# Altium PCB BACK_UP_05_10_Analizador_de_espectro.PcbDoc (part 2 of 2)
Units mil, origin at the board's own origin, x right, y up, seen from the top; angles counter-clockwise.
Board outline 6000 x 4000 mil, 2 copper layers (Top Layer, Bottom Layer); 140 components, 98 nets, 612 pads, 248 vias.
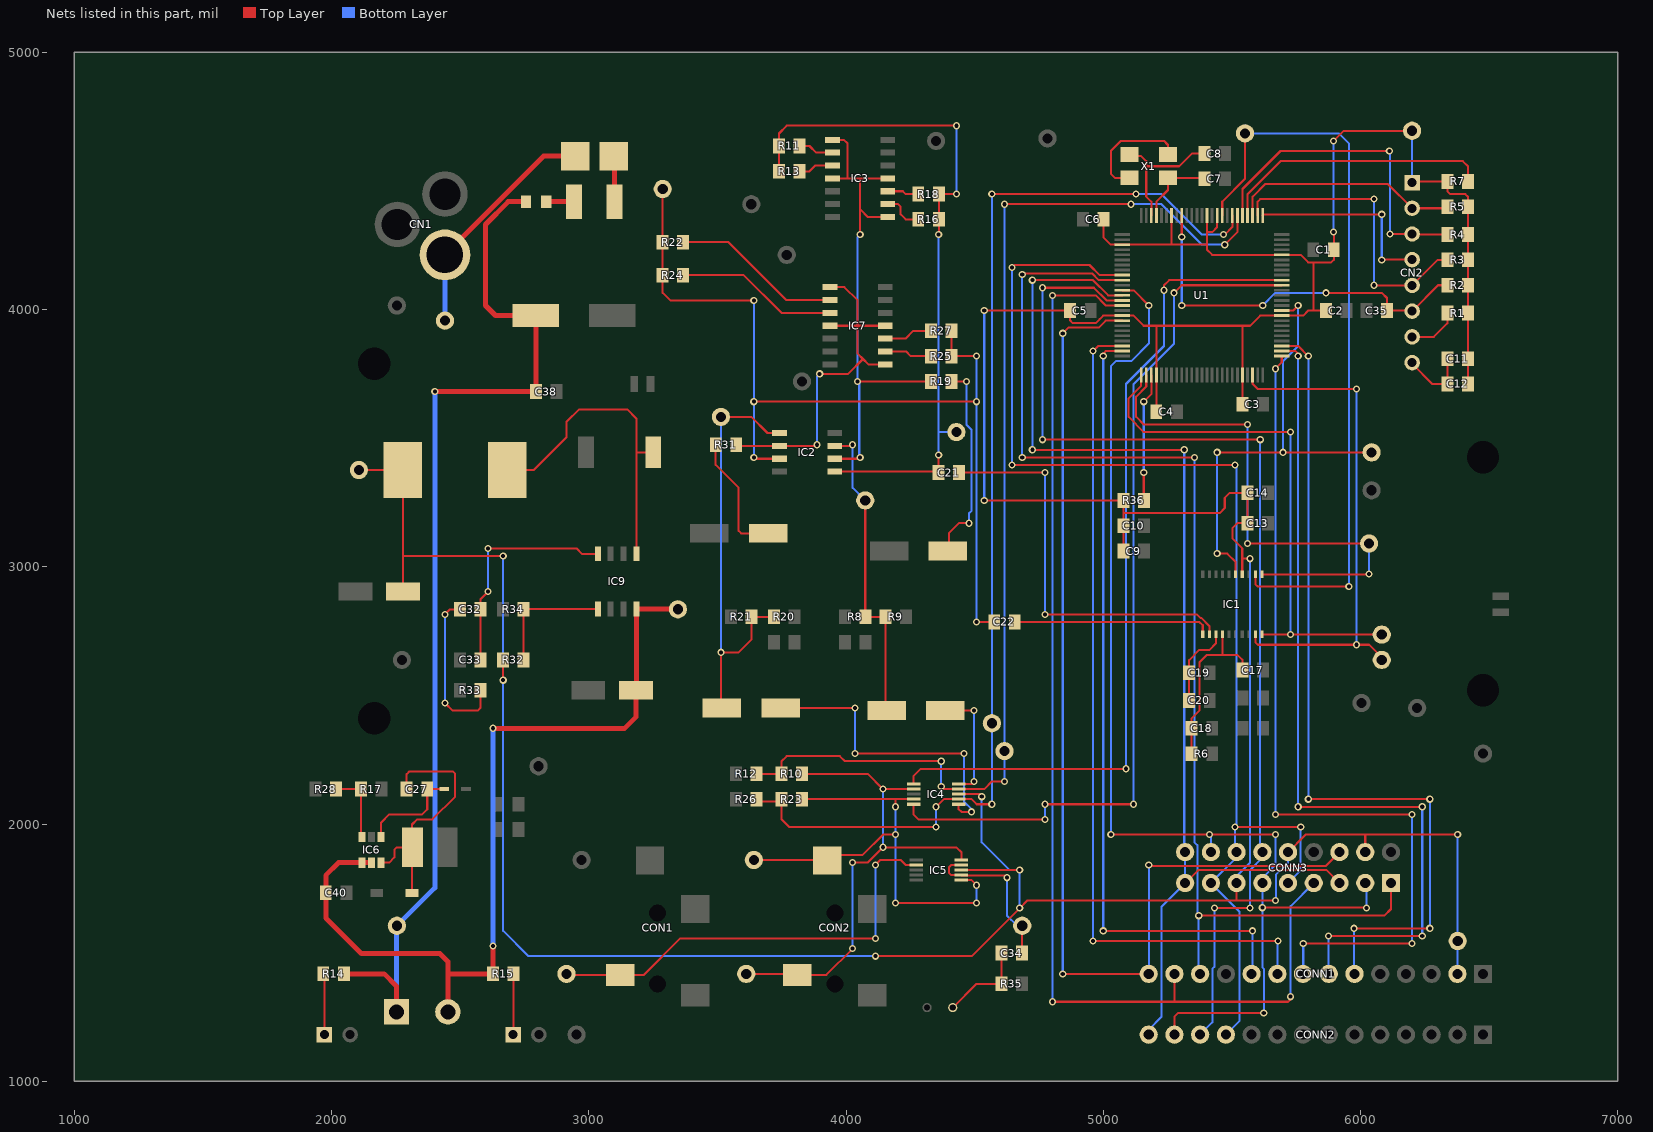
[diagram p2: the nets of this part, all layers, seen from the top]

## Via types
v1: diameter 28, hole 16, Top Layer to Bottom Layer, 248 vias

## Nets (pads, with @x,y where several pads share a name; then routed paths per layer and width w, separated by ;. In a path a pad name is that pad's centre, name@x,y a point inside that pad or via, vN(x,y) a via of type N, cw(c..) or ccw(c..) an arc to the next point about the centre after c; other vN are vias at no path point) (continued)
LCD_CS: CONN1.7 U1.77 | length 3326.3
  Top Layer w8: U1.77@5693.9,3838.58 5748.03,3838.58 5757.87,3828.74 v1(5757.87,3818.9) ; v1(5757.87,2066.93) v1(6240.16,2066.93) ; v1(5875.98,1564.96) v1(6240.16,1564.96)
  Bottom Layer w8: v1(5757.87,2066.93) v1(5757.87,3818.9) ; v1(5875.98,1564.96) 5875.98,1418.11 CONN1.7@5876.77,1417.32 ; v1(6240.16,1564.96) v1(6240.16,2066.93)
LCD_RD: CONN1.10 U1.49 | length 3071.7
  Top Layer w8: v1(5000,1584.65) v1(5580.71,1584.65) ; v1(5000,3818.9) 5000,3828.74 5009.84,3838.58 U1.49@5073.82,3838.58
  Bottom Layer w8: v1(5000,1584.65) v1(5000,3818.9) ; CONN1.10@5576.77,1417.32 5580.71,1421.26 v1(5580.71,1584.65)
LCD_RS: CONN1.8 U1.76 | length 3366.8
  Top Layer w8: v1(5669.29,2037.4) v1(6200.79,2037.4) ; v1(5669.29,3769.68) 5693.9,3794.29 U1.76@5693.9,3818.9 ; v1(5777.56,1535.43) v1(6200.79,1535.43)
  Bottom Layer w8: v1(5669.29,2037.4) v1(5669.29,3769.68) ; CONN1.8@5776.77,1417.32 5777.56,1418.11 v1(5777.56,1535.43) ; v1(6200.79,1535.43) v1(6200.79,2037.4)
LCD_RST: CONN1.6 U1.78 | length 3289.9
  Top Layer w8: U1.78@5693.9,3858.27 5757.87,3858.27 v1(5797.24,3818.9) ; v1(5797.24,2096.46) v1(6269.69,2096.46) ; v1(5974.41,1594.49) v1(6269.69,1594.49)
  Bottom Layer w8: v1(5797.24,2096.46) v1(5797.24,3818.9) ; v1(5974.41,1594.49) 5974.41,1419.69 CONN1.6@5976.77,1417.32 ; v1(6269.69,1594.49) v1(6269.69,2096.46)
LCD_WR: CONN1.9 U1.48 | length 3262.1
  Top Layer w8: v1(4960.63,1545.28) v1(5679.13,1545.28) ; v1(4960.63,3838.58) 4980.31,3858.27 U1.48@5073.82,3858.27
  Bottom Layer w8: v1(4960.63,1545.28) v1(4960.63,3838.58) ; CONN1.9@5676.77,1417.32 5676.77,1542.91 v1(5679.13,1545.28)
MIC-CH: C34.2 IC5.7 IC5.9 TP24.1 | length 635.5
  Top Layer w8: IC5.9@4447.83,1840.55 4409.45,1840.55 4399.61,1830.71 4399.61,1811.02 4409.45,1801.18 IC5.7@4447.83,1801.18 4449.61,1799.4 4617.92,1799.4 v1(4625.98,1791.34) ; C34.2@4684.84,1498.43 4684.84,1604.13 TP24.1@4685.04,1604.33
  Bottom Layer w8: v1(4625.98,1791.34) 4625.98,1643.7 4665.35,1604.33 TP24.1@4685.04,1604.33
MISO: CONN2.13 CONN3.2 CONN3.6 CONN3.17 U1.37 | length 4635.2
  Top Layer w8: v1(5029.53,1958.66) v1(5413.39,1958.66) v1(5669.29,1958.66) ; U1.37@5073.82,4074.8 5118.11,4074.8 v1(5177.17,4015.75) ; CONN2.13@5276.77,1181.1 5276.77,1251.18 5291.28,1265.68 v1(5624.08,1265.68) ; v1(5618.5,1674.8) 6022.05,1674.8 v1(6023.62,1673.23)
  Bottom Layer w8: v1(5029.53,1958.66) 5029.53,3779.53 5049.34,3799.34 5108.39,3799.34 5177.17,3868.11 v1(5177.17,4015.75) ; CONN2.13@5275.59,1182.28 CONN2.13@5276.77,1181.1 ; CONN3.17@5418.5,1890.71 v1@5418.5,1958.66 ; v1(5624.08,1265.68) 5624.2,1265.81 5624.2,1436.97 5618.5,1442.67 v1(5618.5,1674.8) CONN3.6@5618.5,1770.71 5618.5,1789.76 5669.29,1840.55 v1(5669.29,1958.66) ; CONN3.2@6018.5,1770.71 6023.62,1765.59 v1(6023.62,1673.23)
MOSI: CONN2.14 CONN3.3 CONN3.9 CONN3.18 U1.38 | length 4599.2
  Top Layer w8: v1(4724.41,3454.72) v1(5314.96,3454.72) ; v1(4724.41,4114.17) 4960.27,4114.17 5019.33,4055.12 U1.38@5073.82,4055.12 ; CONN3.9@5318.5,1770.71 5368.66,1820.87 5868.35,1820.87 CONN3.3@5918.5,1770.71
  Bottom Layer w8: v1(4724.41,3454.72) v1(4724.41,4114.17) ; CONN2.14@5176.77,1181.1 5176.77,1200.39 5226.38,1250 5226.38,1678.58 CONN3.9@5318.5,1770.71 CONN3.18@5318.5,1890.71 5314.96,1894.25 v1(5314.96,3454.72)
Netc7_2: C7.2 U1.22 X1.1 | length 302.6
  Top Layer w8: U1.22@5206.69,4365.16 5206.69,4419.29 5251.97,4464.57 X1.1@5251.97,4511.81 C7.2@5389.13,4511.81
Netc8_2: C8.2 U1.23 X1.3 | length 541.5
  Top Layer w8: X1.3@5102.36,4602.36 5108.27,4596.46 5147.64,4596.46 5167.32,4576.77 5167.32,4557.09 ; U1.23@5187.01,4365.16 5187.01,4419.29 5167.32,4438.98 5167.32,4557.09 ; C8.2@5393.07,4606.3 5344.49,4606.3 5295.28,4557.09 5167.32,4557.09
Netc11_2: C11.2 C12.2 CN2.8 | length 272.5
  Top Layer w8: CN2.8@6200.79,3793.7 6200.79,3789.37 6279.53,3710.63 C12.2@6337.95,3710.63 C11.2@6337.95,3809.06
NetC17_1: C17.1 C18.2 IC1.4 R6.2 | length 673.4
  Top Layer w8: R6.2@5343.86,2273.62 C18.2@5343.86,2372.05 5343.86,2410.79 5374.02,2440.94 5374.02,2627.95 5403.54,2657.48 5521.65,2657.48 5540.71,2638.43 C17.1@5540.71,2598.43 ; 5463.58,2658.46 IC1.4@5463.58,2738.19
NetC19_1: C19.1 C20.2 IC1.3 | length 324
  Top Layer w8: C20.2@5334.02,2480.32 C19.1@5334.02,2588.58 5334.02,2637.17 5374.02,2677.17 5413.39,2677.17 5437.99,2701.77 IC1.3@5437.99,2738.19
NetC21_1: C21.1 IC1.2 | length 1574.2
  Top Layer w8: C21.1@4439.61,3366.14 v1(4773.62,3366.14) ; v1(4773.62,2814.96) 5364.17,2814.96 5377.7,2801.43 5380.64,2801.43 5412.4,2769.67 IC1.2@5412.4,2738.19
  Bottom Layer w8: v1(4773.62,2814.96) v1(4773.62,3366.14)
NetC22_1: C22.1 IC1.1 | length 770.4
  Top Layer w8: C22.1@4656.14,2785.43 5374.02,2785.43 5386.81,2772.64 IC1.1@5386.81,2738.19
NetC24_1: C24.1 IC2.3 R8.1 R9.2 TP13.1 | length 1208.1
  Top Layer w8: IC2.3@3955.71,3469.88 4021.06,3469.88 v1(4025.59,3474.41) ; TP13.1@4074.8,3257.87 4074.8,2806.38 R8.1@4076.06,2805.12 R9.2@4153.54,2805.12 4153.54,2444.88 C24.1@4157.48,2440.94
  Bottom Layer w8: v1(4025.59,3474.41) 4025.59,3307.09 4069.88,3262.8 TP13.1@4069.88,3252.95
NetC24_2: C24.2 IC4.10 | length 451.9
  Top Layer w8: C24.2@4385.83,2440.94 v1(4498.03,2440.94) ; IC4.10@4437.99,2155.51 4488.19,2155.51 v1(4498.03,2165.35)
  Bottom Layer w8: v1(4498.03,2165.35) v1(4498.03,2440.94)
NetC25_1: C25.1 R19.2 | length 787.4
  Top Layer w8: C25.1@4395.67,3061.02 4399.61,3064.96 4399.61,3129.92 4438.98,3169.29 v1(4478.35,3169.29) ; R19.2@4410.08,3720.47 v1(4468.5,3720.47)
  Bottom Layer w8: v1(4468.5,3720.47) 4468.5,3551.33 4488.19,3531.65 4488.19,3218.5 4478.35,3208.66 v1(4478.35,3169.29)
NetC27_1: C27.1 D5.2 IC6.1 | length 401.3
  Top Layer w8: IC6.1@2193.01,1949.61 2193.01,2006 2224.41,2037.4 2352.36,2037.4 2372.05,2057.09 C27.1@2372.05,2135.83 D5.2@2437.99,2135.83
NetC27_2: C27.2 D6.2 IC6.6 L2.1 | length 983.3
  Top Layer w8: IC6.6@2193.01,1849.61 2223.62,1849.61 2244.09,1870.08 2244.09,1899.61 2253.94,1909.45 L2.1@2312.99,1909.45 ; C27.2@2292.05,2135.83 2292.05,2193.62 2303.15,2204.72 2470.47,2204.72 2480.32,2194.88 2480.32,2106.3 2391.73,2017.72 2332.68,2017.72 2312.99,1998.03 L2.1@2312.99,1909.45 ; D6.2@2312.99,1732.28 L2.1@2312.99,1909.45
NetC32_1: C32.1 C33.1 IC9.4 | length 880.6
  Top Layer w8: C33.1@2579.37,2637.8 C32.1@2579.37,2834.65 2579.37,2874.65 v1(2608.27,2903.54) ; v1(2608.27,3070.87) 2952.76,3070.87 2973.43,3050.2 IC9.4@3035.24,3050.2
  Bottom Layer w8: v1(2608.27,2903.54) v1(2608.27,3070.87)
NetC32_2: C32.2 R33.2 | length 634.3
  Top Layer w8: v1(2440.94,2470.47) 2470.47,2440.94 2568.9,2440.94 2578.74,2450.79 2578.74,2519.06 R33.2@2579.37,2519.68 ; v1(2440.94,2814.96) 2460.63,2834.65 C32.2@2499.37,2834.65
  Bottom Layer w8: v1(2440.94,2470.47) v1(2440.94,2814.96)
NetC34_1: C34.1 MIC1.1 R35.1 | length 348
  Top Layer w8: MIC1.1@4415,1286.26 4506.69,1377.95 4604.37,1377.95 R35.1@4604.84,1378.43 C34.1@4604.84,1498.43
Netc35_1: C35.1 CN2.6 R2.1 U1.17 | length 1502.4
  Top Layer w8: v1(5305.12,4015.75) v1(5620.08,4015.75) ; v1(5305.12,4281.5) U1.17@5305.12,4365.16 ; v1(5866.14,4064.96) 5984.25,4064.96 6082.68,4064.96 6102.99,4044.65 C35.1@6102.99,3996.06 6198.43,3996.06 CN2.6@6200.79,3993.7 6301.57,4094.49 R2.1@6337.95,4094.49
  Bottom Layer w8: v1(5305.12,4015.75) v1(5305.12,4281.5) ; v1(5620.08,4015.75) 5669.29,4064.96 v1(5866.14,4064.96)
NetC36_1: C36.1 IC2.5 R20.1 R21.2 TP16.1 | length 1701.8
  Top Layer w8: TP16.1@3513.78,3582.68 3631.89,3582.68 3694.68,3519.88 IC2.5@3741.14,3519.88 ; C36.1@3517.72,2450.79 3513.78,2454.72 v1(3513.78,2667.32) 3582.68,2667.32 3633.15,2717.8 R21.2@3633.15,2805.12 R20.1@3720.47,2805.12
  Bottom Layer w8: v1(3513.78,2667.32) TP16.1@3513.78,3582.68
NetC36_2: C36.2 IC4.6 | length 1192.5
  Top Layer w8: C36.2@3755.91,2450.79 v1(4035.43,2450.79) ; v1(4035.43,2273.62) v1(4458.66,2273.62) ; IC4.6@4437.99,2076.77 4437.99,2057.09 4438.98,2057.09 4448.82,2047.24 v1(4488.19,2047.24)
  Bottom Layer w8: v1(4035.43,2273.62) v1(4035.43,2450.79) ; v1(4458.66,2273.62) 4458.66,2086.61 4488.19,2057.09 v1(4488.19,2047.24)
NetC37_1: C37.1 R31.2 | length 489.8
  Top Layer w8: R31.2@3493.46,3474.41 3493.46,3396.3 3582.68,3307.09 3582.68,3139.76 3592.52,3129.92 C37.1@3696.85,3129.92
NetCN1_1: CN1.1 D1.1 TP18.1 | length 920.8
  Top Layer w19.68: CN1.1@2440.95,4212.6 2824.8,4596.46 D1.1@2946.85,4596.46
  Bottom Layer w19.68: TP18.1@2440.94,3956.69 CN1.1@2440.95,4212.6
NetCN2_2: CN2.2 R5.1 U1.3 | length 893
  Top Layer w8: U1.3@5580.71,4365.16 5580.71,4438.98 5629.92,4488.19 6106.3,4488.19 CN2.2@6200.79,4393.7 6332.05,4393.7 R5.1@6337.95,4399.61
NetCN2_3: CN2.3 R4.1 U1.5 | length 1283.1
  Top Layer w8: U1.5@5541.34,4365.16 5541.34,4468.5 5688.98,4616.14 v1(6112.2,4616.14) ; v1(6114.57,4293.7) CN2.3@6200.79,4293.7 6203.15,4291.34 R4.1@6337.95,4291.34
  Bottom Layer w8: v1(6112.2,4616.14) 6114.57,4613.78 v1(6114.57,4293.7)
NetCN2_4: CN2.4 U1.1 | length 760.2
  Top Layer w8: U1.1@5620.08,4365.16 5625,4370.08 v1(6082.68,4370.08) ; v1(6082.68,4192.91) 6083.46,4193.7 CN2.4@6200.79,4193.7
  Bottom Layer w8: v1(6082.68,4192.91) v1(6082.68,4370.08)
NetCN2_5: CN2.5 R3.1 U1.2 | length 1170.7
  Top Layer w8: U1.2@5600.39,4365.16 5600.39,4419.29 5610.24,4429.13 v1(6053.15,4429.13) ; v1(6053.15,4094.49) 6053.94,4093.7 CN2.5@6200.79,4093.7 6299.21,4192.13 R3.1@6337.17,4192.13
  Bottom Layer w8: v1(6053.15,4094.49) v1(6053.15,4429.13)
NetCN2_7: CN2.7 R1.1 | length 198.9
  Top Layer w8: CN2.7@6200.79,3893.7 6285.43,3893.7 6337.95,3946.22 R1.1@6337.95,3986.22
NetD1_2: D1.2 PS1.1 | length 181.1
  Top Layer w19.68: PS1.1@3100.39,4419.29 D1.2@3100.39,4600.39
NetD2_2: D2.2 IC9.1 L1.1 | length 1241.5
  Top Layer w8: L1.1@2683.07,3375.98 2785.43,3375.98 2913.39,3503.94 2913.39,3562.99 2962.6,3612.2 3149.61,3612.2 3185.24,3576.57 3185.24,3444.88 ; IC9.1@3185.24,3050.2 3185.24,3444.88 ; D2.2@3250.98,3444.88 3185.24,3444.88
NetD3_1: D3.1 R14.2 | length 238.1
  Top Layer w8: R14.2@1967.87,1417.32 1972.44,1412.76 D3.1@1972.44,1181.1
NetD4_1: D4.1 R15.1 | length 236.8
  Top Layer w8: D4.1@2705.91,1181.1 2707.32,1182.52 R15.1@2707.32,1417.32
NetFB1_1: FB1.1 PS1.2 | length 108.3
  Top Layer w19.68: FB1.1@2834.65,4419.29 PS1.2@2942.91,4419.29
NetIC1_9: IC1.9 TP9.1 U1.73 | length 1997.2
  Top Layer w8: U1.73@5580.71,3745.08 5580.71,3710.63 5600.39,3690.94 v1(5984.25,3690.94) ; IC1.9@5591.54,2738.19 5591.54,2706.69 5601.38,2696.85 v1(5984.25,2696.85) 6033.46,2696.85 6082.68,2647.64 TP9.1@6092.52,2647.64
  Bottom Layer w8: v1(5984.25,2696.85) v1(5984.25,3690.94)
NetIC1_10: IC1.10 TP8.1 U1.51 | length 2090.1
  Top Layer w8: U1.51@5147.64,3745.08 5147.64,3703.73 5098.43,3654.52 5098.43,3582.68 5157.48,3523.62 v1(5728.35,3523.62) ; IC1.10@5617.13,2736.22 v1(5728.35,2736.22) TP8.1@6082.68,2736.22
  Bottom Layer w8: v1(5728.35,2736.22) v1(5728.35,3523.62)
NetIC1_11: IC1.11 TP7.1 U1.52 | length 2093.7
  Top Layer w8: U1.52@5167.32,3745.08 5167.32,3700.79 5127.95,3661.42 5127.95,3582.68 5157.48,3553.15 v1(5561.02,3553.15) ; v1(5561.02,3090.55) TP7.1@6033.46,3090.55 ; IC1.11@5617.13,2970.47 6021.65,2970.47 v1(6033.46,2972.44)
  Bottom Layer w8: v1(5561.02,3090.55) v1(5561.02,3553.15) ; v1(6033.46,2972.44) TP7.1@6033.46,3090.55
NetIC1_12: IC1.12 TP6.1 U1.9 | length 2922.1
  Top Layer w8: U1.9@5462.6,4365.16 5462.6,4419.29 5551.18,4507.87 TP6.1@5551.18,4685.04 ; IC1.12@5591.54,2970.47 5591.54,2932.09 5600.39,2923.23 v1(5954.72,2923.23)
  Bottom Layer w8: TP6.1@5551.18,4694.88 5561.02,4685.04 5915.35,4685.04 5954.72,4645.67 v1(5954.72,2923.23) ; TP6.1@5551.18,4714.57 TP6.1@5561.02,4704.72
NetIC1_15: IC1.15 TP5.1 U1.85 | length 1795.1
  Top Layer w8: v1(5442.91,3051.18) 5482.28,3051.18 5514.76,3018.7 IC1.15@5514.76,2970.47 ; v1(5442.91,3444.88) v1(5698.81,3444.88) TP5.1@6043.31,3444.88 ; U1.85@5693.9,3996.06 5738.19,3996.06 v1(5757.87,4015.75)
  Bottom Layer w8: v1(5442.91,3051.18) v1(5442.91,3444.88) ; v1(5698.81,3444.88) 5698.82,3799.21 5757.87,3858.27 v1(5757.87,4015.75)
NetIC3_2: IC3.2 R11.2 | length 138.5
  Top Layer w8: R11.2@3819.53,4635.83 3858.27,4635.83 3884.29,4609.8 IC3.2@3947.24,4609.8
NetIC3_3: IC3.3 R13.2 | length 137
  Top Layer w8: R13.2@3819.53,4537.4 3858.27,4537.4 3880.67,4559.8 IC3.3@3947.24,4559.8
NetIC3_9: IC3.9 R16.2 | length 165
  Top Layer w8: IC3.9@4161.81,4409.8 4202.4,4409.8 4212.6,4399.61 4212.6,4370.08 4232.28,4350.39 4271.02,4350.39 R16.2@4280.87,4340.55
NetIC3_10: IC3.10 R18.2 | length 123.6
  Top Layer w8: IC3.10@4161.81,4459.8 4221.3,4459.8 4232.28,4448.82 R18.2@4280.87,4448.82
NetIC4_1: IC4.1 U1.91 | length 3275.8
  Top Layer w8: IC4.1@4262.8,2155.51 4261.81,2156.5 4261.81,2185.04 4291.34,2214.57 v1(5088.58,2214.57) ; v1(5236.22,4074.8) 5236.22,4094.49 5255.9,4114.17 U1.91@5693.9,4114.17
  Bottom Layer w8: v1(5088.58,2214.57) 5088.58,3710.63 5236.22,3858.27 v1(5236.22,4074.8)
NetIC4_5: IC4.5 U1.90 | length 3447.2
  Top Layer w8: IC4.5@4262.8,2076.77 4261.81,2075.79 4261.81,2037.4 4281.5,2017.72 v1(4773.62,2017.72) ; v1(4773.62,2076.77) v1(5118.11,2076.77) ; v1(5275.59,4064.96) 5305.12,4094.49 U1.90@5693.9,4094.49
  Bottom Layer w8: v1(4773.62,2017.72) v1(4773.62,2076.77) ; v1(5118.11,2076.77) 5118.11,3710.63 5275.59,3868.11 v1(5275.59,4064.96)
NetIC4_7: IC4.7 R23.2 R26.1 TP14.1 U1.7 | length 4518.5
  Top Layer w8: R26.1@3652.2,2086.61 3749.37,2086.61 3749.37,2018.35 3779.53,1988.19 v1(4350.39,1988.19) ; v1(4350.39,2066.93) 4379.92,2096.46 IC4.7@4437.99,2096.46 4488.19,2096.46 4507.87,2076.77 v1(4566.93,2076.77) ; v1(4566.93,4448.82) v1(5127.95,4448.82) ; v1@5472.44,4291.34 5501.97,4320.87 U1.7@5501.97,4365.16
  Bottom Layer w8: v1(4350.39,1988.19) v1(4350.39,2066.93) ; v1(4566.93,2076.77) TP14.1@4566.93,2391.73 v1(4566.93,4448.82) ; v1(5127.95,4448.82) 5226.38,4448.82 5383.86,4291.34 v1(5467.52,4291.34)
NetIC4_9: IC4.9 R10.2 R12.1 TP11.1 U1.6 | length 4443
  Top Layer w8: R12.1@3652.2,2194.88 R10.2@3749.37,2194.88 3749.37,2243.46 3769.68,2263.78 3976.38,2263.78 3996.06,2244.09 v1(4370.08,2244.09) ; v1(4370.08,2145.67) 4379.92,2135.83 IC4.9@4437.99,2135.83 4537.4,2135.83 4566.93,2165.35 v1(4616.14,2165.35) ; v1(4616.14,4409.45) v1(5108.27,4409.45) ; v1(5472.44,4251.97) 5521.65,4301.18 U1.6@5521.65,4365.16
  Bottom Layer w8: v1(4370.08,2145.67) v1(4370.08,2244.09) ; v1(4616.14,2165.35) TP11.1@4616.14,2283.46 v1(4616.14,4409.45) ; v1(5108.27,4409.45) 5226.38,4409.45 5383.86,4251.97 v1(5472.44,4251.97)
NetIC6_3: IC6.3 R17.1 R28.2 | length 284.7
  Top Layer w8: R28.2@2017.72,2135.83 R17.1@2114.88,2135.83 2114.88,1952.74 IC6.3@2118.01,1949.61
NetIC7_2: IC7.2 R22.2 | length 664.3
  Top Layer w8: R22.2@3366.77,4261.81 3543.31,4261.81 3768.11,4037.01 IC7.2@3937.99,4037.01
NetIC7_3: IC7.3 R24.2 | length 632
  Top Layer w8: R24.2@3366.77,4133.86 3602.36,4133.86 3749.21,3987.01 IC7.3@3937.99,3987.01
NetIC7_9: IC7.9 R25.2 | length 185
  Top Layer w8: IC7.9@4152.56,3837.01 4233.86,3837.01 4251.97,3818.9 R25.2@4330.08,3818.9
NetIC7_10: IC7.10 R27.2 | length 190.1
  Top Layer w8: IC7.10@4152.56,3887.01 4231.5,3887.01 4261.81,3917.32 R27.2@4330.08,3917.32
NetIC9_5: IC9.5 R32.2 R34.2 | length 485.8
  Top Layer w8: R32.2@2746.69,2637.8 R34.2@2746.69,2834.65 2747.68,2835.63 IC9.5@3035.24,2835.63
NetR7_1: R7.1 U1.4 | length 1060.4
  Top Layer w8: U1.4@5561.02,4365.16 5561.02,4448.82 5688.98,4576.77 6397.64,4576.77 6417.95,4556.46 R7.1@6417.95,4498.03
NetR36_1: R36.1 U1.53 | length 499.7
  Top Layer w8: v1(5157.48,3366.14) 5157.48,3258.5 R36.1@5158.11,3257.87 ; v1(5157.48,3641.73) 5187.01,3671.26 U1.53@5187.01,3745.08
  Bottom Layer w8: v1(5157.48,3366.14) v1(5157.48,3641.73)
NetX1_2: X1.2 X1.4 | length 450.6
  Top Layer w8: X1.4@5102.36,4511.81 5045.28,4511.81 5029.53,4527.56 5029.53,4616.14 5068.9,4655.51 5236.22,4655.51 5251.97,4639.76 X1.2@5251.97,4602.36
R-CH: CON1.3 IC5.2 TP26.1 | length 1721.3
  Top Layer w8: TP26.1@2913.39,1417.32 2917.32,1413.39 CON1.3@3122.05,1413.39 3214.57,1413.39 3356.3,1555.12 v1(4114.17,1555.12) ; v1(4114.17,1840.55) 4133.86,1860.24 4212.6,1860.24 4232.28,1840.55 IC5.2@4272.64,1840.55
  Bottom Layer w8: v1(4114.17,1555.12) v1(4114.17,1840.55)
R_SW_A_1: IC2.2 IC3.1 IC3.4 IC3.8 IC3.11 R19.1 | length 2016
  Top Layer w8: IC3.4@3947.24,4509.8 4005.91,4509.8 ; IC3.1@3947.24,4659.8 3991.77,4659.8 4005.91,4645.67 4005.91,4509.8 ; IC2.2@3955.71,3419.88 4049.8,3419.88 v1(4055.12,3425.2) ; v1(4045.28,3720.47) 4202.76,3720.47 R19.1@4330.08,3720.47 ; v1(4055.12,4291.34) 4055.12,4389.76 ; IC3.11@4159.88,4507.87 IC3.11@4161.81,4509.8 4055.12,4509.8 ; IC3.8@4161.81,4359.8 4085.08,4359.8 4055.12,4389.76 ; 4005.91,4509.8 4055.12,4509.8 ; 4055.12,4389.76 4055.12,4509.8
  Bottom Layer w8: v1(4055.12,3425.2) 4051.59,3428.72 4051.59,3714.16 v1(4045.28,3720.47) 4045.28,4281.5 v1(4055.12,4291.34)
R_SW_A_2: IC2.6 IC7.1 IC7.4 IC7.8 IC7.11 R31.1 | length 1464.7
  Top Layer w8: R31.1@3573.46,3474.41 3577.99,3469.88 IC2.6@3741.14,3469.88 3883.27,3469.88 v1(3887.8,3474.41) ; v1(3897.64,3750) 4008.27,3750 4066.14,3807.87 ; IC7.4@3937.99,3937.01 4045.28,3937.01 ; IC7.1@3937.99,4087.01 3993.7,4087.01 4045.28,4035.43 4045.28,3937.01 ; IC7.8@4152.56,3787.01 4087.01,3787.01 4066.14,3807.87 ; IC7.11@4152.56,3937.01 4045.28,3937.01 ; 4045.28,3937.01 4045.28,3828.74 4066.14,3807.87
  Bottom Layer w8: v1(3887.8,3474.41) 3887.8,3740.16 v1(3897.64,3750)
R_SW_B_1: C21.2 IC2.1 R11.1 R13.1 R16.1 R18.1 TP12.1 | length 2740.7
  Top Layer w8: R13.1@3739.53,4537.4 R11.1@3739.53,4635.83 3739.53,4684.41 3769.68,4714.57 v1(4429.13,4714.57) ; IC2.1@3955.71,3369.88 4355.87,3369.88 C21.2@4359.61,3366.14 4360.24,3366.77 v1(4360.24,3435.04) ; v1(4360.24,4291.34) 4360.87,4291.97 R16.1@4360.87,4350.39 R18.1@4360.87,4448.82 v1(4429.13,4448.82)
  Bottom Layer w8: v1(4360.24,3435.04) 4360.24,3523.62 ; v1(4360.24,4291.34) 4360.24,3523.62 ; TP12.1@4429.13,3523.62 4360.24,3523.62 ; v1(4429.13,4448.82) v1(4429.13,4714.57)
R_SW_B_2: C22.2 IC2.7 R22.1 R24.1 R25.1 R27.1 TP15.1 | length 3646.5
  Top Layer w8: TP15.1@3287.4,4468.5 3287.4,4064.96 3316.93,4035.43 v1(3641.73,4035.43) ; v1(3641.73,3425.2) 3641.73,3424.41 3646.26,3419.88 IC2.7@3741.14,3419.88 ; v1(3641.73,3641.73) v1(4507.87,3641.73) ; R27.1@4410.08,3917.32 R25.1@4410.08,3818.9 v1(4507.87,3818.9) ; v1(4507.87,2785.43) C22.2@4576.14,2785.43
  Bottom Layer w8: v1(3641.73,3425.2) v1(3641.73,3641.73) v1(3641.73,4035.43) ; v1(4507.87,2785.43) v1(4507.87,3641.73) v1(4507.87,3818.9)
SCK: CONN2.11 CONN3.5 CONN3.8 CONN3.16 U1.34 | length 4907.7
  Top Layer w8: v1(4645.67,3395.67) v1(5511.81,3395.67) ; v1(4645.67,4163.39) 4655.51,4173.23 4946.47,4173.23 4985.84,4133.86 U1.34@5073.82,4133.86 ; v1(5511.81,1988.19) v1(5767.72,1988.19)
  Bottom Layer w8: v1(4645.67,3395.67) v1(4645.67,4163.39) ; CONN2.11@5476.77,1181.1 5529.34,1233.67 5529.34,1659.87 CONN3.8@5418.5,1770.71 5518.5,1870.71 CONN3.16@5518.5,1890.71 5511.81,1897.4 v1(5511.81,1988.19) 5518,1994.38 5518,3389.48 v1(5511.81,3395.67) ; CONN3.5@5718.5,1770.71 5767.72,1819.92 v1(5767.72,1988.19)
SD_CS: CONN2.12 CONN3.15 U1.39 | length 4261.4
  Top Layer w8: v1(4763.78,3494.09) v1(5610.24,3494.09) ; v1(4763.78,4084.65) 4963.39,4084.65 5012.61,4035.43 U1.39@5073.82,4035.43 ; v1(5433.07,1673.23) v1(5570.87,1673.23)
  Bottom Layer w8: v1(4763.78,3494.09) v1(4763.78,4084.65) ; CONN2.12@5376.77,1181.1 5424.2,1228.54 5424.2,1436.97 5433.07,1445.84 v1(5433.07,1673.23) ; v1(5570.87,1673.23) 5571.2,1673.56 5571.2,1750.94 5571.07,1751.06 5571.07,1790.36 5571.2,1790.48 5571.2,1821.2 5618.5,1868.5 CONN3.15@5618.5,1890.71 ; CONN3.15@5610.24,1890.71 v1(5610.24,3494.09)
SSEL: CONN1.12 CONN3.1 U1.35 | length 4661.1
  Top Layer w8: v1(4685.04,3425.2) v1(5354.33,3425.2) ; v1(4685.04,4136.39) 4688.82,4140.17 4956.9,4140.17 4982.9,4114.17 U1.35@5073.82,4114.17 ; v1(5371.2,1643.7) 6092.52,1643.7 6118.5,1669.68 CONN3.1@6118.5,1770.71
  Bottom Layer w8: v1(4685.04,3425.2) v1(4685.04,4136.39) ; v1(5354.33,3425.2) 5354.33,1929.13 5365.94,1917.53 5365.94,1648.96 v1(5371.2,1643.7) 5371.2,1417.32 CONN1.12@5376.77,1417.32
T_CS: CONN1.13 CONN3.4 U1.40 | length 4560.2
  Top Layer w8: v1(4803.15,1309.06) 5275.59,1309.06 ; v1(4803.15,4055.12) 4970.29,4055.12 5005.98,4019.43 5006.16,4019.43 5009.84,4015.75 U1.40@5073.82,4015.75 ; CONN1.13@5276.77,1417.32 5276.77,1310.24 5275.59,1309.06 ; v1(5728.35,1328.74) 5728.35,1318.9 5718.5,1309.06 5275.59,1309.06
  Bottom Layer w8: v1(4803.15,1309.06) v1(4803.15,4055.12) ; v1(5728.35,1328.74) 5728.35,1680.55 CONN3.4@5818.5,1770.71
T_IRQ: CONN1.14 CONN3.12 U1.43 | length 4264.8
  Top Layer w8: v1(4842.52,1417.32) CONN1.14@5176.77,1417.32 ; v1(4842.52,3907.48) 4866.02,3930.98 4875.14,3930.98 4875.26,3930.85 4949.31,3930.85 4949.44,3930.98 4984.13,3930.98 5009.84,3956.69 U1.43@5073.82,3956.69 ; v1(5177.17,1840.55) 5180.85,1836.87 5864.66,1836.87 CONN3.12@5918.5,1890.71
  Bottom Layer w8: v1(4842.52,1417.32) v1(4842.52,3907.48) ; CONN1.14@5176.77,1417.32 5177.17,1417.72 v1(5177.17,1840.55)
VCC: C1.1 C2.1 C3.1 C4.1 C5.1 C6.1 C9.1 C10.1 C11.1 C12.1 C13.2 C14.1 C30.1 CN2.1 CONN1.2 CONN3.7 CONN3.11 CONN3.14 IC1.14 IC4.8 IC5.8 L1.2 R1.2 R2.2 R3.2 R4.2 R5.2 R7.2 R32.1 R36.2 TP2.1 TP21.1 TP23.1 U1.10 U1.12 U1.19 U1.28 U1.42 U1.54 U1.71 U1.84 U1.96 | length 17395.2
  Top Layer w8: TP21.1@2106.3,3375.98 L1.2@2277.56,3375.98 2277.56,3041.34 ; C30.1@2277.56,2903.54 2277.56,3041.34 ; R32.1@2666.69,2637.8 2666.69,2559.68 v1(2667.32,2559.06) ; v1(2667.32,3041.34) 2277.56,3041.34 ; v1(4114.17,1486.22) 4488.19,1486.22 v1(4675.2,1673.23) 4704.72,1702.76 v1(5669.29,1702.76) ; IC4.8@4437.99,2116.14 4527.56,2116.14 v1(4527.56,2106.3) ; IC5.8@4447.83,1820.87 v1(4675.2,1820.87) ; v1(4537.4,3257.87) R36.2@5078.11,3257.87 5078.11,3208.66 ; v1(4537.4,3996.06) C5.1@4871.42,3996.06 4871.42,3957.32 4881.89,3946.85 4942.68,3946.85 4942.81,3946.98 4970.97,3946.98 4986.55,3962.55 4986.55,3962.93 5000,3976.38 U1.42@5073.82,3976.38 5118.11,3976.38 5157.48,3937.01 5206.69,3937.01 ; C6.1@5000.63,4340.55 5000.63,4280.87 5029.53,4251.97 U1.28@5073.82,4251.97 5265.75,4251.97 ; C9.1@5078.11,3061.02 C10.1@5078.11,3159.45 5078.11,3208.66 ; C4.1@5206.69,3602.99 U1.54@5206.69,3745.08 5206.69,3937.01 ; U1.19@5265.75,4365.16 5265.75,4251.97 ; U1.12@5403.54,4365.16 5403.54,4301.18 ; U1.10@5442.91,4365.16 5442.91,4320.87 5423.23,4301.18 5403.54,4301.18 ; CONN3.7@5515.32,1770.71 CONN3.7@5518.5,1770.71 5518.5,1705.91 ; IC1.14@5540.35,2970.47 5540.35,3031.5 ; C3.1@5541.34,3631.89 U1.71@5541.34,3745.08 5541.34,3937.01 ; v1(5570.87,3031.5) 5540.35,3031.5 ; CONN3.14@5718.5,1890.71 5786.46,1958.66 v1(6377.95,1958.66) ; C2.1@5865.51,3996.06 5816.93,3996.06 ; v1(5895.67,4301.18) 5896.3,4300.55 C1.1@5896.3,4232.28 5896.3,4193.54 5885.83,4183.07 5816.93,4183.07 ; v1(5895.67,4655.51) 5935.04,4694.88 TP2.1@6200.79,4694.88 ; CONN3.11@6018.5,1890.71 6018.5,1958.66 ; CN2.1@6200.79,4493.7 6205.12,4498.03 R7.2@6337.95,4498.03 6337.95,4459.29 6348.43,4448.82 6407.48,4448.82 6417.95,4438.35 R5.2@6417.95,4399.61 R3.2@6417.95,4192.91 R2.2@6417.95,4094.49 R1.2@6417.95,3986.22 C11.1@6417.95,3809.06 C12.1@6417.95,3710.63 ; 5078.11,3208.66 5452.76,3208.66 5472.44,3228.35 5472.44,3267.72 5492.13,3287.4 C14.1@5560.39,3287.4 C13.2@5560.39,3169.29 5521.65,3169.29 5501.97,3149.61 5501.97,3110.24 5540.35,3071.85 5540.35,3031.5 ; 5206.69,3937.01 5570.87,3937.01 5610.24,3976.38 U1.84@5693.9,3976.38 5777.56,3976.38 5797.24,3996.06 5816.93,3996.06 ; 5265.75,4251.97 5403.54,4251.97 5403.54,4261.81 ; 5403.54,4261.81 5403.54,4232.28 5423.23,4212.6 U1.96@5693.9,4212.6 5767.72,4212.6 5767.72,4212.22 5796.87,4183.07 5816.93,4183.07 ; 5403.54,4261.81 5403.54,4301.18 ; 5816.93,3996.06 5816.93,4183.07
  Bottom Layer w8: v1(2667.32,3041.34) v1(2667.32,2559.06) 2667.32,1584.65 2765.75,1486.22 v1(4114.17,1486.22) ; v1(4527.56,2106.3) 4527.56,1929.13 4635.83,1820.87 v1(4675.2,1820.87) v1(4675.2,1673.23) ; v1(4537.4,3257.87) v1(4537.4,3996.06) ; CONN3.7@5518.5,1770.71 5518.5,1798.03 5570.87,1850.39 v1(5570.87,3031.5) ; v1(5669.29,1702.76) 5671.07,1704.54 5671.07,1802.96 5718.5,1850.39 CONN3.14@5718.5,1890.71 ; v1(5895.67,4301.18) v1(5895.67,4655.51) ; CN2.1@6200.79,4493.7 TP2.1@6200.79,4694.88 ; CONN1.2@6376.77,1417.32 6376.77,1544.09 TP23.1@6377.95,1545.28 v1(6377.95,1958.66)
VIN: C31.1 C40.1 IC6.4 IC6.5 IC9.8 R15.2 SW1.2 TP20.1 | length 3390.1
  Top Layer w19.68: IC6.5@2155.51,1849.61 IC6.4@2118.01,1849.61 2026.77,1849.61 1977.72,1800.55 C40.1@1977.72,1732.28 1977.72,1634.49 2116.14,1496.06 2421.26,1496.06 2452.36,1464.96 2452.36,1417.32 ; SW1.2@2452.36,1269.68 2452.36,1417.32 ; v1(2627.95,1525.59) 2627.32,1524.96 R15.2@2627.32,1417.32 2452.36,1417.32 ; v1(2627.95,2372.05) 3139.76,2372.05 3183.07,2415.35 C31.1@3183.07,2519.68 3185.24,2521.85 IC9.8@3185.24,2835.63 3345.47,2835.63 TP20.1@3346.46,2834.65
  Bottom Layer w19.68: v1(2627.95,1525.59) v1(2627.95,2372.05)
VIN_SW: C29.1 C38.1 FB1.2 R14.1 SW1.1 TP19.1 | length 4207.2
  Top Layer w19.68: R14.1@2047.87,1417.32 2204.72,1417.32 2252.36,1369.68 SW1.1@2252.36,1269.68 ; v1(2401.57,3681.1) C38.1@2794.65,3681.1 2794.29,3681.46 C29.1@2794.29,3976.38 2637.8,3976.38 2598.43,4015.75 2598.43,4330.71 2687.01,4419.29 FB1.2@2755.91,4419.29
  Bottom Layer w8: TP19.1@2252.36,1602.76 TP19.1@2253.94,1604.33
  Bottom Layer w19.68: SW1.1@2252.36,1269.68 TP19.1@2252.36,1602.76 ; TP19.1@2253.94,1604.33 2401.57,1751.97 v1(2401.57,3681.1)
VINL: CON2.2 IC4.4 IC5.6 R23.1 TP27.1 | length 1884.4
  Top Layer w8: TP27.1@3641.73,1860.24 3828.74,1860.24 ; R23.1@3828.74,2085.98 R23.1@3829.37,2086.61 ; 3829.37,1860.87 3828.74,1860.24 ; R23.1@3829.37,2096.46 4192.91,2096.46 ; v1(4192.91,1692.91) v1(4507.87,1692.91) ; v1(4192.91,1958.66) 4143.7,1958.66 4064.96,1879.92 3948.82,1879.92 CON2.2@3927.17,1858.27 3925.2,1860.24 3828.74,1860.24 ; v1(4192.91,2066.93) 4192.91,2096.46 ; IC4.4@4262.8,2096.46 4192.91,2096.46 ; IC5.6@4447.83,1781.5 4488.19,1781.5 v1(4507.87,1761.81)
  Bottom Layer w8: v1(4192.91,1692.91) v1(4192.91,1958.66) v1(4192.91,2066.93) ; v1(4507.87,1692.91) v1(4507.87,1761.81)
VINR: CON2.3 IC4.2 IC5.10 R10.1 TP25.1 | length 1962.1
  Top Layer w8: TP25.1@3612.2,1417.32 3807.09,1417.32 CON2.3@3811.02,1413.39 3923.23,1413.39 v1(4025.59,1515.75) ; R10.1@3829.37,2194.88 4084.65,2194.88 v1(4143.7,2135.83) IC4.2@4262.8,2135.83 ; v1(4025.59,1850.39) 4084.65,1850.39 v1(4143.7,1909.45) 4429.13,1909.45 4448.82,1889.76 4448.82,1861.22 IC5.10@4447.83,1860.24
  Bottom Layer w8: v1(4025.59,1515.75) v1(4025.59,1850.39) ; v1(4143.7,1909.45) v1(4143.7,2135.83)
pads on no net: C1.0 C2.0 C3.0 C4.0 C5.0 C6.0 C7.0 C8.0 C9.0 C10.0 C11.0 C12.0 C13.0 C14.0 C15.0 C16.0 C17.0 C18.0 C19.0 C20.0 C21.0 C22.0 C23.0 C26.0 C27.0 C28.0 C32.0 C33.0 C34.0 C35.0 C38.0 C39.0 C40.0 CON1. CON1.4 CON2. CON2.4 R1.0 R2.0 R3.0 R4.0 R5.0 R6.0 R7.0 R8.0 R9.0 R10.0 R11.0 R12.0 R13.0 R14.0 R15.0 R16.0 R17.0 R18.0 R19.0 R20.0 R21.0 R22.0 R23.0 R24.0 R25.0 R26.0 R27.0 R28.0 R31.0 R32.0 R33.0 R34.0 R35.0 R36.0 U1.8 U1.13 U1.14 U1.16 U1.18 U1.20 U1.21 U1.24 U1.25 U1.26 U1.27 U1.29 U1.30 U1.32 U1.33 U1.44 U1.45 U1.50 U1.56 U1.64 U1.65 U1.66 U1.67 U1.68 U1.69 U1.70 U1.74 U1.82 U1.86 U1.87 U1.88 U1.89 U1.98 U1.99 U1.100

## Polygon pours and split planes (outlines as drawn)
AGND on Top Layer "Top Layer-No Net" (solid, pour order 22): 1850.39,4773.62 4734.25,4773.62 4734.25,1023.62 1850.39,1023.62
GND on Top Layer "Top Layer-No Net" (solid, pour order 12): 6742.13,4773.62 4724.41,4773.62 4724.41,2864.17 6742.13,2864.17
GND on Top Layer "Top Layer-No Net" (solid, pour order 10): 6742.13,2145.67 4724.41,2145.67 4724.41,1023.62 6742.13,1023.62
AGND on Top Layer "Top Layer-No Net" (solid, pour order 6): 4724.41,2854.33 6742.13,2854.33 6742.13,2165.35 4724.41,2165.35
EARTH on Top Layer "Top Layer-No Net" (solid, pour order 16): 1850.39,4773.62 3198.82,4773.62 3198.82,3641.73 1850.39,3641.73
GND on Bottom Layer "Top Layer-No Net" (solid, pour order 26): 1850.39,4773.62 1850.39,1023.62 6742.13,1023.62 6742.13,4773.62

## Keep-outs
Keep-Out Layer:
  circle w10: c2165.35,3789.37 r127.95
  circle w10: c6476.38,2519.68 r127.95
  circle w10: c2165.35,2411.42 r127.95
  circle w10: c6476.38,3425.2 r127.95
  lines w1.97: 1879.92,1053.15 4822.83,1053.15 6712.6,1053.15 6712.6,4744.09 1879.92,4744.09 1879.92,1053.15

## Silkscreen, mask and mechanical layers (free items; w line width, h text height)
Mechanical 1:
  lines w1.97: 1850.39,1023.62 6742.13,1023.62 6742.13,4773.62 1850.39,4773.62 1850.39,1023.62

## Text inside footprints (layer, text, board x,y; h text height)
C14: Top Overlay "+" at 5512.39,3312.4 h39.37
C16: Top Overlay "+" at 5668.71,2347.05 h39.37 r180
C17: Top Overlay "+" at 5492.71,2623.43 h39.37
C19: Top Overlay "+" at 5286.02,2613.58 h39.37
C21: Top Overlay "+" at 4487.61,3341.14 h39.37 r180
C22: Top Overlay "+" at 4704.14,2760.43 h39.37 r180
C24: Top Overlay "+" at 4073.65,2508.94 h39.37
C25: Top Overlay "+" at 4479.5,2993.02 h39.37 r180
C29: Top Overlay "+" at 2714.91,4028.38 h39.37
C30: Top Overlay "+" at 2352.04,2832.54 h39.37 r180
C31: Top Overlay "+" at 3257.55,2448.68 h39.37 r180
C36: Top Overlay "+" at 3433.89,2518.79 h39.37
C37: Top Overlay "+" at 3780.68,3061.92 h39.37 r180
D1: Top Overlay "K" at 3081.65,4667.46 h30; Top Overlay "A" at 2911.65,4666.46 h30
D2: Top Overlay "K" at 3248.03,3238.19 h30; Top Overlay "A" at 2962.6,3238.19 h30
D3: Top Overlay "A" at 1958.66,1072.83 h39.37
D4: Top Overlay "A" at 2610.91,1166.1 h39.37